# Altium PCB Cook_It.PcbDoc
Units mil, origin at the board's own origin, x right, y up, seen from the top; angles counter-clockwise.
Board outline 3665 x 1590 mil, 2 copper layers (Top Layer, Bottom Layer); 64 components, 73 nets, 302 pads, 25 vias.
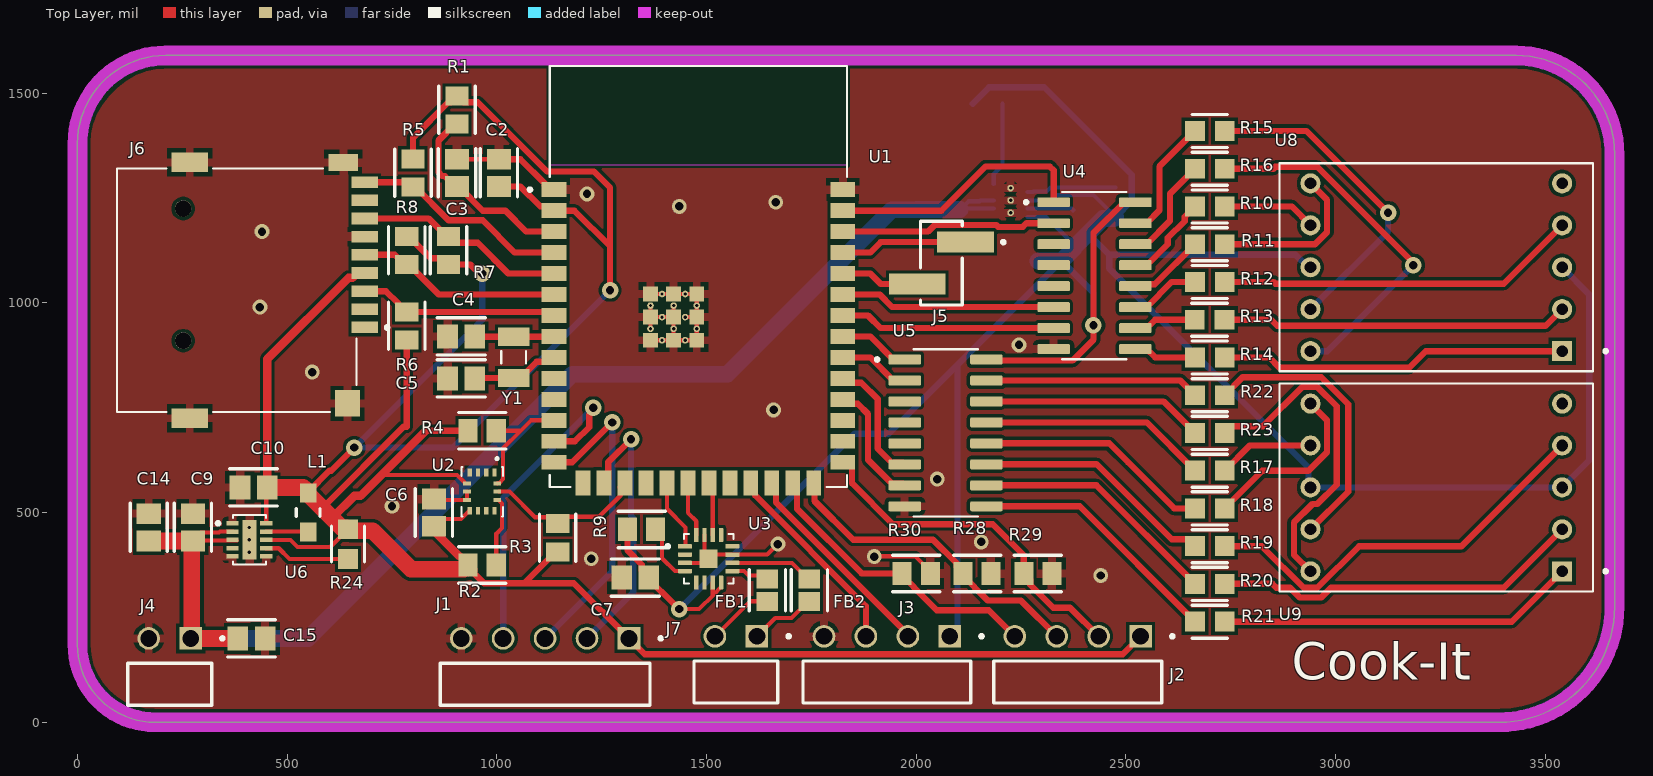
[diagram p0: Top Layer view]
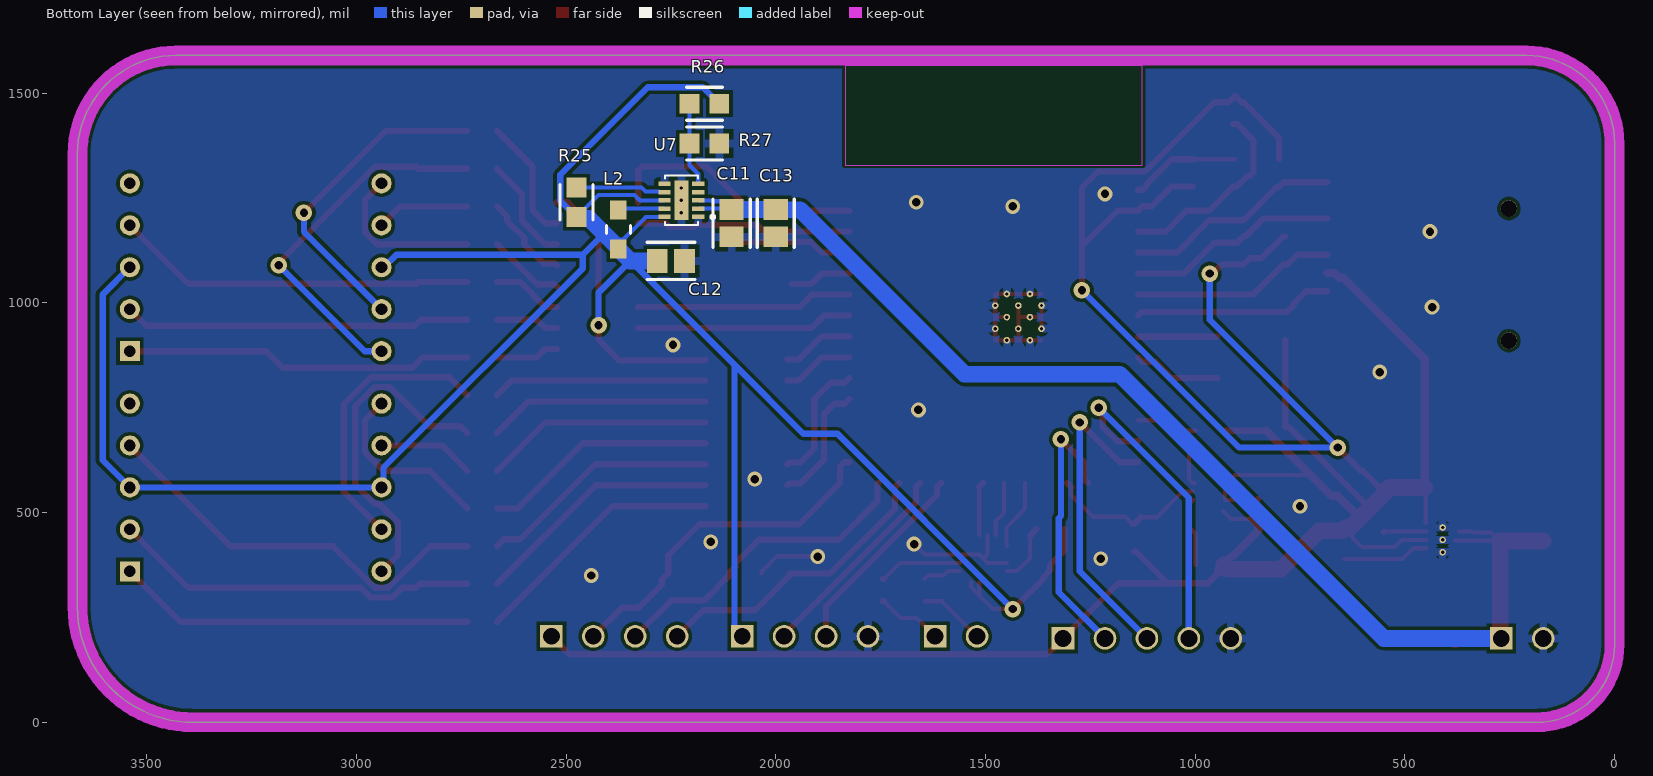
[diagram p1: Bottom Layer view, seen from below]
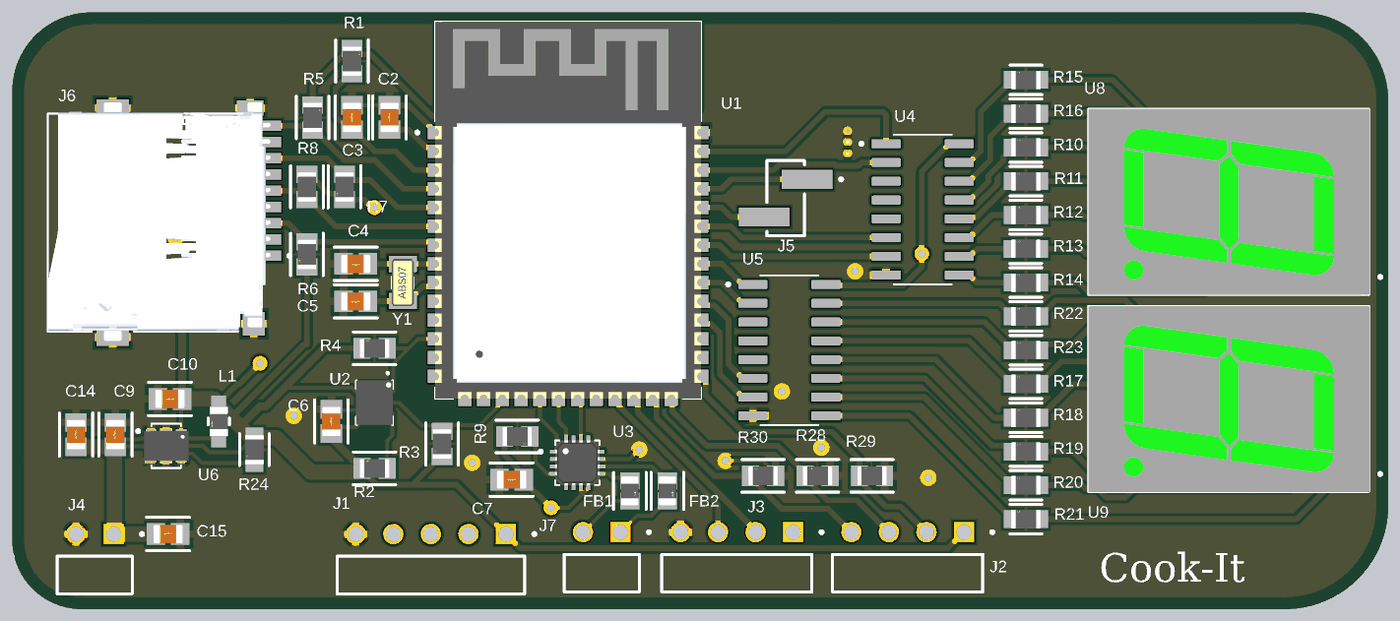
[diagram p2: 3D render of the assembled board from above, using the file's embedded part models]
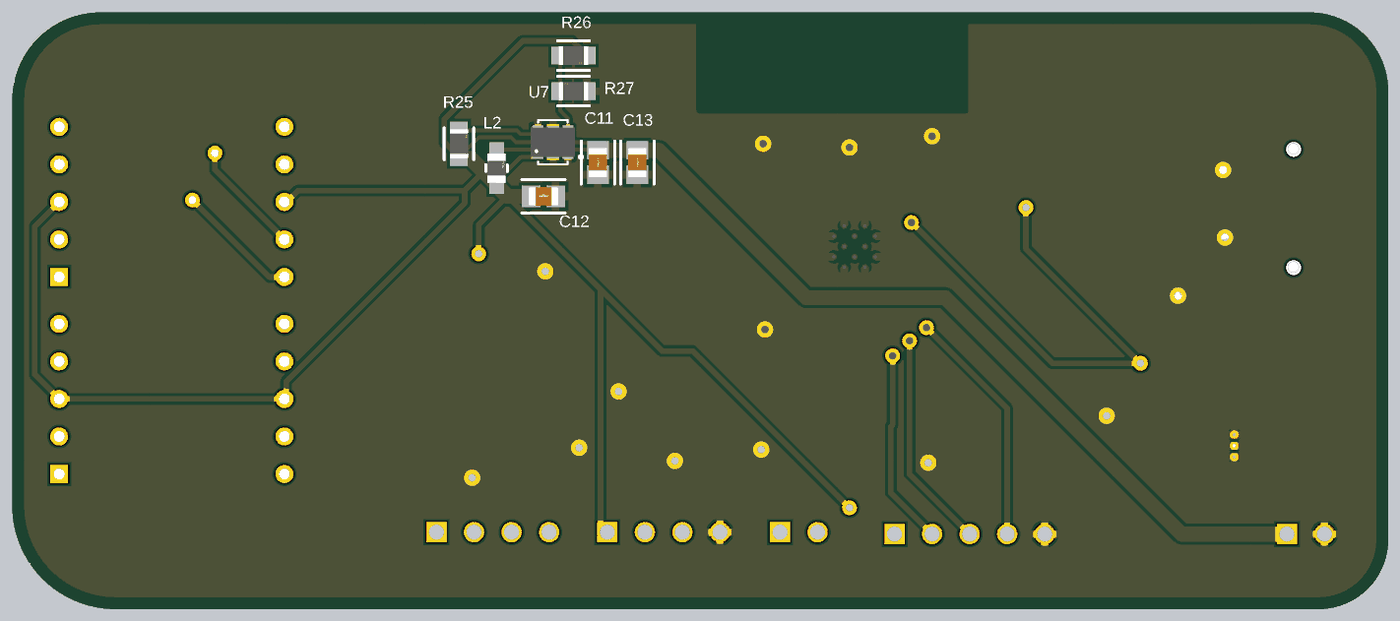
[diagram p3: 3D render of the assembled board from below, using the file's embedded part models]

## Layer stack, top to bottom
Top Solder: solder mask 0.4, Solder Resist, Dk 3.5
Top Layer: signal copper 1.4
Dielectric 1: dielectric 12.6, FR-4, Dk 4.8
Bottom Layer: signal copper 1.4
Bottom Solder: solder mask 0.4, Solder Resist, Dk 3.5

## Board outline
0,1380 0,185 ccw(c185,185) 185,0 3390,0 ccw(c3390,275) 3665,275 3665,1355 ccw(c3430,1355) 3430,1590 210,1590 ccw(c210,1380)

## Design rules (kind name [scope] priority, off if disabled: settings)
BoardOutlineClearance [All] p1: gap=7.87 ignorepadtopadclearanceinfootprint=FALSE except(15.75: Arc-SplitBarrior Arc-SplitContinuation Track-SplitBarrior Track-SplitContinuation SMDPad-SplitBarrior SMDPad-SplitContinuation THPad-SplitBarrior THPad-SplitContinuation Via-SplitBarrior Via-SplitContinuation Fill-SplitBarrior Fill-SplitContinuation Poly-SplitBarrior Poly-SplitContinuation Region-SplitBarrior Region-SplitContinuation Text-SplitBarrior Text-SplitContinuation)
Clearance "Clearance Bottom Layer" [OnLayer('Bottom Layer')] p1: gap=8 ignorepadtopadclearanceinfootprint=TRUE except(10: Arc-Text Track-Text SMDPad-Text THPad-Text Via-Text Fill-Text Poly-Text Region-Text Text-Text)
Clearance "Clearance Top Layer" [OnLayer('Top Layer')] p2: gap=8 ignorepadtopadclearanceinfootprint=TRUE except(10: Arc-Text Track-Text SMDPad-Text THPad-Text Via-Text Fill-Text Poly-Text Region-Text Text-Text)
Clearance [All] p3: gap=7.87 ignorepadtopadclearanceinfootprint=FALSE except(3.5: Arc-Arc Arc-Track Arc-SMDPad Track-Track Track-SMDPad SMDPad-SMDPad; 5: Arc-Via Track-Via SMDPad-Via THPad-Via Via-Via; 10: Arc-Text Track-Text SMDPad-Text THPad-Text Via-Text Fill-Text Poly-Text Region-Text Text-Text)
HoleSize [All] p1: absolutevalues=TRUE maxlimit=248.03 minlimit=7.87 maxpercent=80.000 minpercent=20.000
MinimumAnnularRing [All] p1: minimumring=3
MinimumSolderMaskSliver [All] p1: minsoldermaskwidth=3.94
PolygonConnect PolygonConnect_1 [All] p1: thpad.connectstyle=Relief thpad.reliefconductorwidth=20 thpad.reliefentries=4 thpad.polygonreliefangle="90 Angle" thpad.airgapwidth=10 smdpad.connectstyle=Relief smdpad.reliefconductorwidth=20 smdpad.reliefentries=4 smdpad.polygonreliefangle="90 Angle" smdpad.airgapwidth=10 via.connectstyle=Direct via.reliefconductorwidth=20 via.reliefentries=4 via.polygonreliefangle="90 Angle" via.airgapwidth=10
RoutingCorners [All] p1: cornerstyle=Round minsetback=100 maxsetback=100
RoutingVias [All] p1: holewidth=19.68 width=39.37 viastyle="Through Hole" minholewidth=7.87 minwidth=17.72 maxholewidth=39.37 maxwidth=78.74
SilkToSilkClearance [All] p1: silktosilkclearance=3.94
SilkToSolderMaskClearance [IsPad] p1: minsilkscreentomaskgap=3.94 clearancetoexposedcopper=TRUE
SolderMaskExpansion [All] p1: expansion=4 istentingtop=FALSE
SupplyNets "Schematic Supply Nets" [InNet('GND')] p1: voltage=0.000
Width [All] p1: maxlimit=100 minlimit=3.5 preferedwidth=15
25 further rules are at their usual default settings.

## Classes and differential pairs
component class Power: C9 C10 C11 C12 C13 C14 C15 L1 L2 R24 R25 R26 R27 U6 U7
component class Cook_It: C2 C3 C4 C5 C6 C7 FB1 FB2 R1 R2 R3 R4 R5 R6 R7 R8 R9 R10 R11 R12 R13 R14 R15 R16 R17 R18 R19 R20 R21 R22 R23 R28 R29 R30 U1 U2 U3 U4 U5 Y1
component class Connectors: J1 J2 J3 J4 J5 J6 J7 U8 U9

## Components (designator, comment, footprint, x,y, rotation, side; value= is the part's Value field where it differs from the comment)
C2 "0.1u" FP-GRM21B-0_2-e0_2_0_7-IPC_B 1005,1310 r90 top
C3 "1u" FP-GRM21B-0_2-e0_2_0_7-IPC_B 905,1310 r90 top
C4 "12p" FP-GRM21B-0_2-e0_2_0_7-IPC_B 915,920 r180 top
C5 "12p" FP-GRM21B-0_2-e0_2_0_7-IPC_B 915,820 r180 top
C6 "0.1u" FP-GRM21B-0_2-e0_2_0_7-IPC_B 850,500 r90 top
C7 "0.1u" FP-GRM21B-0_2-e0_2_0_7-IPC_B 1330,345 r180 top
C9 "0.1u" FP-GRM21B-0_2-e0_2_0_7-IPC_B 275,465 r90 top
C10 "22u" FP-GRM21B-0_2-e0_2_0_7-IPC_B 420,560 r180 top
C11 "2.2u" FP-GRM21B-0_2-e0_2_0_7-IPC_B 2105,1190 r270 bottom
C12 "22u" FP-GRM21B-0_2-e0_2_0_7-IPC_B 2250,1100 r180 bottom
C13 "0.1u" FP-GRM21B-0_2-e0_2_0_7-IPC_B 2000,1190 r270 bottom
C14 "2.2u" FP-GRM21B-0_2-e0_2_0_7-IPC_B 170,465 r90 top
C15 "10u" FP-GRM21B-0_2-e0_2_0_7-IPC_B 415,200 r0 top
FB1 "" FP-BMB2A1000LN2-IPC_C 1645,315 r270 top
FB2 "" FP-BMB2A1000LN2-IPC_C 1745,315 r270 top
J1 "TSW-105-22-G-S-RA" SAMTEC_TSW-105-22-G-S-RA 1315,200 r0 top
J2 "TSW-104-22-G-S-RA" SAMTEC_TSW-104-22-G-S-RA 2535,205 r0 top
J3 "TSW-104-22-G-S-RA" SAMTEC_TSW-104-22-G-S-RA 2080,205 r0 top
J4 "TSW-102-22-G-S-RA" SAMTEC_TSW-102-22-G-S-RA 270,200 r0 top
J5 "TSM-102-01-X-SV" SAMTEC_TSM-102-01-X-SV 2060,1095 r90 top
J6 "MSD-4-A" CUI_MSD-4-A 380,1030 r270 top
J7 "TSW-102-22-G-S-RA" SAMTEC_TSW-102-22-G-S-RA 1620,205 r0 top
L1 "10u" FP-LQM21DN_70-MFG 550,500 r90 top
L2 "10u" FP-LQM21DN_70-MFG 2375,1175 r270 bottom
R1 "10k" FP-TFCR0805-IPC_B 905,1460 r270 top
R2 "100k" FP-TFCR0805-IPC_B 965,375 r0 top
R3 "2.2k" FP-TFCR0805-IPC_B 1145,440 r90 top
R4 "2.2k" FP-TFCR0805-IPC_B 965,695 r0 top
R5 "10k" FP-TFCR0805-IPC_B 800,1310 r270 top
R6 "10k" FP-TFCR0805-IPC_B 785,945 r90 top
R7 "10k" FP-TFCR0805-IPC_B 885,1125 r90 top
R8 "10k" FP-TFCR0805-IPC_B 785,1125 r270 top
R9 "1M" FP-TFCR0805-IPC_B 1345,460 r180 top
R10 "200" FP-TFCR0805-MFG 2700,1230 r0 top
R11 "200" FP-TFCR0805-MFG 2700,1140 r0 top
R12 "200" FP-TFCR0805-MFG 2700,1050 r0 top
R13 "200" FP-TFCR0805-MFG 2699.57,960 r0 top
R14 "200" FP-TFCR0805-MFG 2700,870 r0 top
R15 "200" FP-TFCR0805-MFG 2700,1410 r0 top
R16 "200" FP-TFCR0805-MFG 2700,1320 r0 top
R17 "200" FP-TFCR0805-MFG 2700,600 r0 top
R18 "200" FP-TFCR0805-MFG 2700,510 r0 top
R19 "200" FP-TFCR0805-MFG 2700,420 r0 top
R20 "200" FP-TFCR0805-MFG 2700,330 r0 top
R21 "200" FP-TFCR0805-MFG 2700,240 r0 top
R22 "200" FP-TFCR0805-MFG 2700,780 r0 top
R23 "200" FP-TFCR0805-MFG 2700,690 r0 top
R24 "100k" FP-TFCR0805-MFG 645,425 r90 top
R25 "100k" FP-TFCR0805-MFG 2475,1240 r270 bottom
R26 "52.3k" FP-TFCR0805-MFG 2170,1475 r0 bottom
R27 "10k" FP-TFCR0805-MFG 2170,1380 r180 bottom
R28 "51k" FP-TFCR0805-IPC_B 2145,355 r0 top
R29 "51k" FP-TFCR0805-IPC_B 2290,355 r0 top
R30 "51k" FP-TFCR0805-IPC_B 2000,355 r0 top
U1 "ESP32-S3-WROOM-1-N8R8" XCVR_ESP32S3WROOM1N8R8 1480.51,1062.91 r0 top
U2 "BMI270" XDCR_BMI270 965,550 r270 top
U3 "MAX98357AETE+T" QFN50P300X300X80-17N 1505,390 r0 top
U4 "SN74LS47N" SOIC127P600X175-16N 2425,1065 r0 top
U5 "SN74LS47N" SOIC127P600X175-16N 2070,690 r0 top
U6 "TPS62175DQCR" SON50P300X200X80-11N240X84 410,435 r0 top
U7 "TPS62175DQCR" SON50P300X200X80-11N240X84 2225,1244.4 r0 bottom
U8 "LDSC512RI" LED_LDSC512RI 3240,1085 r180 top
U9 "LDSC512RI" LED_LDSC512RI 3240,560 r180 top
Y1 "32.768k" XTAL_ABS07-32.768KHZ-T 1040,870 r90 top

## Footprints (in the part's own frame and the unit in brackets; to place one, negate y for a bottom-side part, rotate by r counter-clockwise, add the part's x,y. Pads: shape width x height; smd on the part's side, far side on the other; paste and mask are expansions set on the pad)
CUI_MSD-4-A [mm]
  rect 0.7x1.6 smd: 1(2.25,7.75) 2(1.15,7.75) 3(0.05,7.75) 4(-1.05,7.75) 5(-2.15,7.75) 6(-3.25,7.75) 7(-4.35,7.75) 8(-5.45,7.75) CD(-6.55,7.75)
  rect 1.022x1.8 smd: G1(-7.75,6.45)
  rect 1.6x1.5 smd: G2(6.85,6.7)
  rect 1.2x2.2 smd: G3(-7.75,-2.85) G4(7.75,-2.85)
  round 1 hole 1 unplated: ""(-4.95,-3.25) ""(3.05,-3.25)
  silkscreen extent -7.37,-7.25 7.37,9.2, body extent -8.15,-7.24 8,7.81, height 1.8
FP-BMB2A1000LN2-IPC_C [mil]
  rect 45.45x51.43 smd paste+0 mask+0: 1(-26.61,0) 2(26.61,0)
  silkscreen extent -49,-43 49,43, body extent -53,-31 53,31, height 10
FP-GRM21B-0_2-e0_2_0_7-IPC_B [mil]
  rect 49.4x57.33 smd paste+0 mask+0: 1(-32.51,0) 2(32.51,0)
  silkscreen extent -57,-44 57,44, body extent -67,-39 67,39, height 10
FP-LQM21DN_70-MFG [mm]
  rect 1.15x1 smd paste+0 mask+0: 1(-1.175,0) 2(1.175,0)
  silkscreen extent -0.23,-0.72 0.23,0.72, body extent -1,-0.63 1,0.63, height 1.45
FP-TFCR0805-IPC_B [mil]
  rect 45.5x55.44 smd paste+0 mask+0: 1(-33.51,0) 2(33.51,0)
  silkscreen extent -56,-43 56,43, body extent -66,-38 66,38, height 10
FP-TFCR0805-MFG [mm]
  rect 1.2x1.2 smd paste+0 mask+0: 1(-0.9,0) 2(0.9,0)
  silkscreen extent -1.07,-1 1.07,1, body extent -1.6,-0.8 1.6,0.8, height 0.25
LED_LDSC512RI [mm]
  rect 1.218x1.218 / inner round 1.218 / far side rect 1.218x1.218 hole 0.71: 1(-7.62,5.08)
  round 1.218 hole 0.71: 2(-7.62,2.54) 3(-7.62,0) 4(-7.62,-2.54) 5(-7.62,-5.08) 6(7.62,-5.08) 7(7.62,-2.54) 8(7.62,0) 9(7.62,2.54) 10(7.62,5.08)
  silkscreen extent -10.35,-6.3 9.5,6.3, body extent -9.53,-6.3 9.47,6.3, height 8
QFN50P300X300X80-17N [mm]
  rrect25% 0.84x0.27 smd mask+0.051: 1(-1.435,0.75) 4(-1.435,-0.75) 9(1.435,-0.75) 12(1.435,0.75)
  rrect25% 0.84x0.27 smd mask+0.064: 2(-1.435,0.25) 3(-1.435,-0.25) 10(1.435,-0.25) 11(1.435,0.25)
  rrect25% 0.27x0.84 smd mask+0.051: 5(-0.75,-1.435) 8(0.75,-1.435) 13(0.75,1.435) 16(-0.75,1.435)
  rrect25% 0.27x0.84 smd mask+0.064: 6(-0.25,-1.435) 7(0.25,-1.435) 14(0.25,1.435) 15(-0.25,1.435)
  rect 1.1x1.1 smd paste-0.2: 17(0,0)
  silkscreen extent -2.57,-1.5 1.5,1.5, body extent -1.5,-1.5 1.5,1.5, height 0.9
SAMTEC_TSM-102-01-X-SV [mm]
  rect 1.27x3.43 smd: 01(1.27,-1.46) 02(-1.27,1.46)
  silkscreen extent -2.54,-3.85 2.54,1.27
SAMTEC_TSW-102-22-G-S-RA [mm]
  rect 1.37x1.37 hole 1.02: 01(0,0)
  round 1.37 hole 1.02: 02(-2.54,0)
  silkscreen extent -3.81,-4.04 2.02,0.1
SAMTEC_TSW-104-22-G-S-RA [mm]
  rect 1.37x1.37 / inner round 1.37 / far side rect 1.37x1.37 hole 1.02: 01(0,0)
  round 1.37 hole 1.02: 02(-2.54,0) 03(-5.08,0) 04(-7.62,0)
  silkscreen extent -8.89,-4.04 2.02,0.1
SAMTEC_TSW-105-22-G-S-RA [mm]
  rect 1.37x1.37 hole 1.02: 01(0,0)
  round 1.37 hole 1.02: 02(-2.54,0) 03(-5.08,0) 04(-7.62,0) 05(-10.16,0)
  silkscreen extent -11.43,-4.04 2.02,0.1
SOIC127P600X175-16N [mm]
  rrect25% 1.97x0.6 smd: 1(-2.475,4.445) 2(-2.475,3.175) 3(-2.475,1.905) 4(-2.475,0.635) 5(-2.475,-0.635) 6(-2.475,-1.905) 7(-2.475,-3.175) 8(-2.475,-4.445) 9(2.475,-4.445) 10(2.475,-3.175) 11(2.475,-1.905) 12(2.475,-0.635) 13(2.475,0.635) 14(2.475,1.905) 15(2.475,3.175) 16(2.475,4.445)
  silkscreen extent -4.24,-5.06 1.95,5.06
SON50P300X200X80-11N240X84 [mm]
  rrect7% 0.74x0.27 smd mask+0.064: 1(-1.02,1) 2(-1.02,0.5) 3(-1.02,0) 4(-1.02,-0.5) 5(-1.02,-1) 6(1.02,-1) 7(1.02,-0.5) 8(1.02,0) 9(1.02,0.5) 10(1.02,1)
  rect 0.84x2.4 smd paste-2 mask+0.038: 11(0,0)
  round 0.4 hole 0.2: 11_1(0,0.747) 11_2(0,0) 11_3(0,-0.747)
  silkscreen extent -2,-1.5 1,1.5, body extent -1.5,-1 1.5,1, height 0.8
XCVR_ESP32S3WROOM1N8R8 [mm]
  rect 1.5x0.9 smd: 1(-8.75,5.26) 2(-8.75,3.99) 3(-8.75,2.72) 4(-8.75,1.45) 5(-8.75,0.18) 6(-8.75,-1.09) 7(-8.75,-2.36) 8(-8.75,-3.63) 9(-8.75,-4.9) 10(-8.75,-6.17) 11(-8.75,-7.44) 12(-8.75,-8.71) 13(-8.75,-9.98) 14(-8.75,-11.25) 27(8.75,-11.25) 28(8.75,-9.98) 29(8.75,-8.71) 30(8.75,-7.44) 31(8.75,-6.17) 32(8.75,-4.9) 33(8.75,-3.63) 34(8.75,-2.36) 35(8.75,-1.09) 36(8.75,0.18) 37(8.75,1.45) 38(8.75,2.72) 39(8.75,3.99) 40(8.75,5.26)
  rect 0.9x1.5 smd: 15(-6.985,-12.5) 16(-5.715,-12.5) 17(-4.445,-12.5) 18(-3.175,-12.5) 19(-1.905,-12.5) 20(-0.635,-12.5) 21(0.635,-12.5) 22(1.905,-12.5) 23(3.175,-12.5) 24(4.445,-12.5) 25(5.715,-12.5) 26(6.985,-12.5)
  rect 0.9x0.9 smd: 41_1(-1.5,-2.46) 41_2(-2.9,-2.46) 41_3(-0.1,-2.46) 41_4(-2.9,-3.86) 41_5(-1.5,-3.86) 41_6(-0.1,-3.86) 41_7(-2.9,-1.06) 41_8(-1.5,-1.06) 41_9(-0.1,-1.06)
  round 0.4 hole 0.2 mask+0: 41_10(-1.5,-1.76) 41_11(-2.9,-1.76) 41_12(-0.1,-1.76) 41_13(-2.9,-3.16) 41_14(-1.5,-3.16) 41_15(-0.1,-3.16) 41_16(-2.2,-1.06) 41_17(-0.8,-1.06) 41_18(-2.2,-2.46) 41_19(-0.8,-2.46) 41_20(-2.2,-3.86) 41_21(-0.8,-3.86)
  Keep-Out Layer region: 9,6.75 -9,6.75 -9,12.75 9,12.75
  Keep-Out Layer region: 9,6.75 -9,6.75 -9,12.75 9,12.75
  silkscreen extent -10.3,-12.75 9,12.75, body extent -9,-12.75 9,12.75, height 3.25
XDCR_BMI270 [mm]
  rect 0.475x0.25 smd mask+0.064: 1(-1.162,0.75) 2(-1.162,0.25) 3(-1.162,-0.25) 4(-1.162,-0.75) 8(1.162,-0.75) 9(1.162,-0.25) 10(1.162,0.25) 11(1.162,0.75)
  rect 0.25x0.475 smd mask+0.064: 5(-0.5,-0.913) 6(0,-0.913) 7(0.5,-0.913) 12(0.5,0.913) 13(0,0.913) 14(-0.5,0.913)
  silkscreen extent -2.07,-1.25 1.5,1.25, body extent -1.5,-1.25 1.5,1.25, height 0.87
XTAL_ABS07-32.768KHZ-T [mm]
  rect 1.1x1.9 smd: 1(-1.25,0) 2(1.25,0)
  silkscreen extent -0.38,-0.75 0.38,0.75, body extent -1.6,-0.75 1.6,0.75, height 0.89

## Part data
C2 C3 C4 C5 C6 C7 C9 C10 C11 C12 C13 C14 C15: library part CMP-06035-063309-1, "CAP CER 2.2UF 100V X7T 0805"
FB1 FB2: library part CMP-03232-000001-1, "FERRITE BEAD 1 KOHM 0805 1LN", Case Code (Imperial)=0805, Case Code (Metric)=2012, DC Resistance (DCR)=300mR, Max Current Rating=350mA, Max Operating Temperature=125°C, Min Operating Temperature=-55°C, Resistor Type="Ferrite Bead", Tolerance=25%, Case/Package=0805, Core Material=Ferrite, Depth=1.4mm, ELV=Compliant, Height=1.1mm, Impedance=1kR, Lead/Base Style=SMD/SMT, Max DC Current=350mA, Mount="Surface Mount", Number of Lines=1, Number of Pins=2, Packaging="Tape and Reel", RoHS Compliant=Yes, Series=BMB-L
J1: "Conn Unshrouded Header HDR 5 POS 2.54mm Solder RA Side Entry Thru-Hole Bulk", Package=None, Availability="In Stock", Check_prices=https://www.snapeda.com/parts/TSW-105-22-G-S-RA/Samtec/view-part/?ref=eda, MF=Samtec, MP=TSW-105-22-G-S-RA, Price=None, Purchase-URL=https://pricing.snapeda.com/search/part/TSW-105-22-G-S-RA/?ref=eda, SnapEDA_Link=https://www.snapeda.com/parts/TSW-105-22-G-S-RA/Samtec/view-part/?ref=snap
J2 J3 J4 J7: Package=None, Availability=Unavailable, MF=Samtec, Price=None
  J2 J3: MP=TSW-104-22-G-S-RA
  J4 J7: MP=TSW-102-22-G-S-RA
J5: "TSM - Samtec 2.54mm Single Row Vertical Surface Mount Header 5.84mm Post Height (01) - Fast Stock", Package=None, Check_prices=https://www.snapeda.com/parts/TSM-102-01-L-SV/Samtec+Inc./view-part/?ref=eda, MF=Samtec, MP=TSM-102-01-L-SV, SnapEDA_Link=https://www.snapeda.com/parts/TSM-102-01-L-SV/Samtec+Inc./view-part/?ref=snap
J6: "Micro SD Card Connector, 9 Positions, Connector and Ejector, Push In, Auto Eject Out, Surface Mount, 1.8 mm Height Above Board, Gold Flash", Package=None, Check_prices=https://www.snapeda.com/parts/MSD-4-A/Same+Sky/view-part/?ref=eda, MF="Same Sky", MP=MSD-4-A, SnapEDA_Link=https://www.snapeda.com/parts/MSD-4-A/Same+Sky/view-part/?ref=snap
L1 L2: library part CMP-00260-111578617-1, "LQM21DN330M70L Multilayer Inductor, 33 µH, 2.99 ohm, 16 MHz, 200 mA, 0805 [2012 Metric], LQM", Case/Package=0805, Current Rating=200mA, Inductance=33µH, Manufacturer Lifecycle Status="IN PRODUCTION NEW", Max Operating Temperature=125°C, Min Operating Temperature=-55°C, Resistance=2.99Ω, Saturation Current=80mA, Self Resonant Frequency=16MHz, Test Frequency=1MHz, Tolerance=20%, Core Material=Ferrite, Height=1.45mm, NexarPartId=111578617, RMS Current (Irms)=200mA, Schedule B="8504500000, 8504500000", Series Resistance=2.99Ω
R1 R2 R3 R4 R5 R6 R7 R8 R9 R28 R29 R30: library part CMP-250906-214896-1, "RES Thin Film,  499kΩ, 0.1%, 0.125W, 25ppm/°C, 0805"
R10 R11 R12 R13 R14 R15 R16 R17 R18 R19 R20 R21 R22 R23 R24 R25 R26 R27: library part CMP-250906-142014-1, "RES Thin Film,  1.72kΩ, 1%, 0.125W, 25ppm/°C, 0805"
U1: "Bluetooth, WiFi 802.11b/g/n, Bluetooth v5.0 Transceiver Module 2.4GHz PCB Trace Surface Mount", Package=None, Availability="In Stock", Check_prices=https://www.snapeda.com/parts/ESP32-S3-WROOM-1-N8R8/Espressif+Systems/view-part/?ref=eda, MF="Espressif Systems", MP=ESP32-S3-WROOM-1-N8R8, Price=None, Purchase-URL=https://pricing.snapeda.com/search?q=ESP32-S3-WROOM-1-N8R8&ref=eda, SnapEDA_Link=https://www.snapeda.com/parts/ESP32-S3-WROOM-1-N8R8/Espressif+Systems/view-part/?ref=snap
U2: "Accelerometer, Gyroscope, 6 Axis Sensor IÂ²C, SPI Output", Package="LGA-14 Bosch Sensortec", Check_prices=https://www.snapeda.com/parts/BMI270/Bosch+Sensortec/view-part/?ref=eda, Digi-Key_Part_Number=828-1091-2-ND, MF="Bosch Sensortec", MP=BMI270, Purchase-URL=https://pricing.snapeda.com/search/part/BMI270/?ref=eda, SnapEDA_Link=https://www.snapeda.com/parts/BMI270/Bosch+Sensortec/view-part/?ref=snap
U3: "Tiny, Low-Cost, PCM Class D Amplifier with Class AB Performance", Package="TQFN-16 Maxim", Check_prices=https://www.snapeda.com/parts/MAX98357AETE+T/Analog+Devices/view-part/?ref=eda, MF="Analog Devices", MP=MAX98357AETE+T, SnapEDA_Link=https://www.snapeda.com/parts/MAX98357AETE+T/Analog+Devices/view-part/?ref=snap
U4 U5: "Decoder/Driver Single 4-to-7 16-Pin PDIP Tube", Package=None, Check_prices=https://www.snapeda.com/parts/SN74LS47N/Onsemi/view-part/?ref=eda, MF=onsemi, MP=SN74LS47N, SnapEDA_Link=https://www.snapeda.com/parts/SN74LS47N/Onsemi/view-part/?ref=snap
U6 U7: "28V, 0.5A Step-Down Converter with SNOOZE Mode 10-WSON -40 to 85", Package="WSON-10 Texas Instruments", Availability=Good, Check_prices=https://www.snapeda.com/parts/TPS62175DQCR/Texas%20Instruments/view-part/494000/?ref=eda, MF="Texas Instruments", MP=TPS62175DQCR, Price=None, Purchase-URL=https://pricing.snapeda.com/search/part/TPS62175DQCR/?ref=eda, SnapEDA_Link=https://www.snapeda.com/parts/TPS62175DQCR/Texas%20Instruments/view-part/494000/?ref=snap
U8 U9: ".56IN. 7 SEGMENT SINGLE DISPLAY, 565NM GREEN, GRAY FACE, WHITE SEGMENTS, COMMON", Package=None, Check_prices=https://www.snapeda.com/parts/LDS-C512RI/Lumex/view-part/?ref=eda, MF=Lumex, MP=LDS-C512RI, SnapEDA_Link=https://www.snapeda.com/parts/LDS-C512RI/Lumex/view-part/?ref=snap
Y1: library part ABS07-32.768KHZ-T, "32.768 kHz Â±20ppm Crystal 12.5pF 70 kOhms 2-SMD, No Lead", Package="SMD-2 Abracon LLC", Availability="In Stock", Check_prices=https://www.snapeda.com/parts/ABS07-32.768KHZ-T/Abracon+LLC/view-part/?ref=eda, MF=Abracon, MP=ABS07-32.768KHZ-T, Price=None, Purchase-URL=https://pricing.snapeda.com/search/part/ABS07-32.768KHZ-T/?ref=eda, SnapEDA_Link=https://www.snapeda.com/parts/ABS07-32.768KHZ-T/Abracon+LLC/view-part/?ref=snap

## Via types
v1: diameter 35.43/35.43 (per signal layer), hole 20.12, Top Layer to Bottom Layer, 15 vias
v2: diameter 39.37, hole 19.68, Top Layer to Bottom Layer, 10 vias

## Nets (pads, with @x,y where several pads share a name; then routed paths per layer and width w, separated by ;. In a path a pad name is that pad's centre, name@x,y a point inside that pad or via, vN(x,y) a via of type N, cw(c..) or ccw(c..) an arc to the next point about the centre after c; other vN are vias at no path point)
3V3: C2.1 C6.1 C10.1 J1.01 J2.01 J6.4 L1.2 R1.1 R2.1 R3.1 R4.1 R5.1 R6.1 R7.1 R8.1 R24.2 U1.2 U2.5 U2.8 U6.8 U6.10 | length 7537.2
  Top Layer w10: U6.8@449.17,435 508.03,435 524.93,418.1 602.67,418.1 R24.2 ; U6.10@450,475 450,557.49 C10.1 ; 725,590 905,590 U2.5@922.57,572.43 ; C6.1@867.2,484.69 914.69,484.69 U2.8@934.85,504.85
  Top Layer w15: L1.2 550,548.58 550,549.21 600.79,600 605,600 v2(660,655) ; 583.22,510.72 777.5,705 785,705 R6.1 ; R8.1 789.97,1158.51 818.75,1129.74 819.14,1129.74 842.14,1106.74 869.75,1106.74 R7.1 936.92,1091.49 958.41,1070 v2(965,1070) ; R5.1 800,1393.88 884.38,1478.26 889.75,1478.26 R1.1 920.25,1478.26 954.66,1478.26 1119.76,1313.16 1231.84,1313.16 1270,1275 1270,1135 ; 830,695 R4.1 ; C6.1 C6.1@867.2,484.69 ; R2.1@911.27,395.22 916.24,395.22 R2.1@933.97,377.49 ; R2.1@946.74,364.72 946.74,354.38 969.34,331.78 1065.32,331.78 ; C2.1 1056.17,1277.49 1103.44,1230.22 1125.81,1230.22 U1.2 1185,1220 1270,1135 ; R3.1 1140.03,406.49 1065.32,331.78 ; v2(1270,1030) 1270,1135 ; J2.01 2492.53,162.53 1352.47,162.53 J1.01 1183.22,331.78 1065.32,331.78
  Top Layer w20: C10.1 452.51,866.16 646.17,1059.81 655.87,1059.81 667.4,1071.34 J6.4 ; 606.97,486.97 660,540 675,540 725,590 830,695 ; C6.1 850,456.49 R2.1@911.27,395.22
  Top Layer w40: C10.1 538.58,560 L1.2@550,548.58 ; L1.2 550,543.94 583.22,510.72 606.97,486.97 629.88,464.06 641.38,464.06 R24.2 648.62,456.81 703.19,456.81 795,365 921.49,365 923.77,367.28 928.74,367.28 931.49,370.03 R2.1
  Bottom Layer w15: v2(965,1070) 965,960 v2(660,655) 895,655 v2(1270,1030)
5V: C7.1 C12.1 J3.01 L2.2 R9.2 R25.2 R26.1 U3.7 U3.8 U4.16 U5.16 U7.8 U7.10 U8.3 U8.8 U9.3 U9.8 | length 6876.6
  Top Layer w10: v2(1435,270) 1482.24,270 1516.12,303.88 ; U3.7 1514.84,305.16 1516.12,303.88 ; U3.8 1534.53,322.28 1516.12,303.88
  Top Layer w15: R9.2 1311.49,409.78 1345.31,375.95 1345.31,362.2 C7.1 1362.51,341.03 1393.25,310.29 1394.71,310.29 v2(1435,270) v2@1437.13,267.87 ; U5.16 2169.75,862.69 2372.69,862.69 2422.55,912.55 v2(2422.55,946.66) 2422.55,1167.08 2495.47,1240 U4.16
  Bottom Layer w10: U7.10 2309.77,1205.03 2364.27,1150.53 L2.2@2394.47,1150.53 ; U7.8 2324.4,1244.4 2336.9,1256.9 2422.67,1256.9 R25.2
  Bottom Layer w15: v2(1435,270) 1852.81,687.81 1934.07,687.81 2098.13,851.87 ; J3.01 2098.13,223.13 2098.13,851.87 ; R26.1 2173.69,1514.12 2305.48,1514.12 2514.12,1305.48 2514.12,1243.69 R25.2 ; 2410,1165 2460,1115 ; v2(2422.55,946.66) 2422.55,1023.71 2346.26,1100 2098.13,851.87 ; U8.8 2934.27,1085 2904.27,1115 2460,1115 ; U8.3 3605,1020 3605,625 U9.3 U9.8 2935.48,564.52 2935.48,606.48 2460,1081.96 2460,1115
  Bottom Layer w40: C12.1@2290,1100 2346.26,1100 L2.2 2375,1131.06 2394.47,1150.53 2444.88,1200.94 2471.38,1200.94 R25.2
9V: C9.1 C11.1 C13.1 C14.1 C15.1 J4.01 U6.2 U6.3 U7.2 U7.3 | length 3092.6
  Top Layer w10: C9.1 C9.1@276.14,433.63 ; U6.2@370.83,454.68 339.68,454.68 337.19,452.19 294.7,452.19 C9.1@276.14,433.63 ; U6.3@380.46,433.63 C9.1@276.14,433.63
  Top Layer w15: C15.1@380,197.51 C15.1
  Top Layer w20: C9.1@272.5,429.99 C9.1 ; C15.1 C15.1@382.49,203.97
  Top Layer w40: C14.1 C9.1 ; C9.1@272.5,429.99 272.5,202.5 J4.01 377.79,200 380,197.79 C15.1@380,197.51
  Bottom Layer w10: C11.1 C11.1@2107.21,1224.72 ; U7.2 C11.1@2107.21,1224.72 ; U7.3 2153.06,1244.4 2150.87,1242.21 2124.7,1242.21 C11.1@2107.21,1224.72
  Bottom Layer w40: J4.01 550,200 1180,830 1550,830 1942.15,1222.15 1999.64,1222.15 C13.1 C11.1
A1: U1.34 U4.7 | length 515
  Top Layer w15: U1.34 1885,970 1915,940 U4.7
A2: U1.30 U5.7 | length 296.6
  Top Layer w15: U1.30 1835.22,759.78 1860.22,759.78 1885,735 1885,625.59 1941.28,569.31 1968.25,569.31 U5.7
B1: U1.39 U4.1 | length 625.9
  Top Layer w15: U1.39 2060,1220 2165,1325 2318.77,1325 2327.56,1316.21 U4.1
B2: U1.33 U5.1 | length 170.3
  Top Layer w15: U1.33 1890.59,920 1945.59,865 U5.1
BCLK_MAX: U1.20 U3.16 | length 132.6
  Top Layer w10: U1.20 1455.51,499.49 1475.47,479.53 U3.16
C1: U1.38 U4.2 | length 514.4
  Top Layer w15: U1.38 2028.04,1170 2043.54,1185.5 2191.42,1185.5 2195.73,1181.19 2253.87,1181.19 2262.67,1190 U4.2
C2: U1.32 U5.2 | length 170.3
  Top Layer w15: U1.32 1890.59,870 1945.59,815 U5.2
CLK_SD: J6.5 R8.2 U1.6 | length 490.1
  Top Layer w15: J6.5 756.87,1114.65 780.03,1091.49 R8.2 789.97,1091.49 861.46,1020 U1.6
CLK_Strip: J3.02 U1.24 | length 500.2
  Top Layer w15: U1.24 1665.73,560.57 1665.73,523.93 1980,209.66 J3.02
CS_SD: J6.CD R5.2 U1.4 | length 520.4
  Top Layer w15: J6.CD 788.61,1287.87 R5.2 804.97,1276.49 884.69,1196.76 966.07,1196.76 1042.83,1120 U1.4
D1: U1.35 U4.6 | length 515
  Top Layer w15: U1.35 1913.08,1020 1943.08,990 U4.6
D2: U1.31 U5.6 | length 301.7
  Top Layer w15: U1.31 1835.22,809.78 1868.96,809.78 1908,770.74 1908,652.59 1941.28,619.31 1968.25,619.31 U5.6
Data_Strip: J3.03 U1.23 | length 479.5
  Top Layer w15: U1.23 1615.73,560.57 1615.73,541.24 1880,276.97 J3.03
DIN_MAX: U1.19 U3.1 | length 169.2
  Top Layer w10: U1.19 1405.51,509.12 1450,464.64 1450,422.15 U3.1@1448.5,420.66
GND: C2.2 C3.2 C4.2 C5.2 C6.2 C7.2 C9.2 C10.2 C11.2 C12.2 C13.2 C14.2 C15.2 J1.05 J3.04 J4.02 J6.6 J6.G1 J6.G2 J6.G3 J6.G4 R27.2 R28.2 R29.2 R30.2 U1.1 U1.40 U1.41_1 U1.41_2 U1.41_3 U1.41_4 U1.41_5 U1.41_6 U1.41_7 U1.41_8 U1.41_9 U1.41_10 U1.41_11 U1.41_12 U1.41_13 U1.41_14 U1.41_15 U1.41_16 U1.41_17 U1.41_18 U1.41_19 U1.41_20 U1.41_21 U2.6 U2.7 U3.3 U3.11 U3.15 U3.17 U4.8 U5.8 U6.1 U6.5 U6.6 U6.11 U6.11_1 U6.11_2 U6.11_3 U7.1 U7.6 U7.11 U7.11_1 U7.11_2 U7.11_3 | length 1368.8
  Top Layer w10: C6.2@852.2,530.32 U2.7 U2.6 ; C3.2 C2.2 ; U1.41_4 U1.41_20 U1.41_5 ; U1.41_13 U1.41_2 ; U1.41_11 U1.41_2 ; U1.41_7 U1.41_16 U1.41_8 U1.41_17 U1.41_9 U1.41_12 U1.41_3 ; U1.41_10 U1.41_1 ; U3.3 1495.16,380.16 U3.17 ; U1.41_19 U1.41_3 ; U3.15 1495.16,399.84 U3.17 ; v1(1670,425) 1644.84,399.84 U3.11 1514.84,399.84 U3.17 ; v1(1900,395) 1900.72,395.72 1997.76,395.72 2033.51,359.97 R30.2 ; U1.41_2 U1.41_18 U1.41_1 ; U1.41_5 U1.41_14 U1.41_1 ; U1.41_5 U1.41_21 U1.41_6 U1.41_15 U1.41_3
  Top Layer w15: C6.2 C6.2@852.2,530.32 ; C2.2 1056.17,1342.51 1114,1284.68 1114,1280.22 1124.21,1270 U1.1
  other v1: 2440,350 1225,390 2155,430 750,515 2050,580 1660,745 560,835 2245,900 435,990 440,1170 1435,1230 1665,1240 1215,1260
Hall_1: J1.02 U1.16 | length 653.6
  Top Layer w15: U1.16 1265.73,581 1265.73,620.73 v2(1320,675)
  Bottom Layer w15: J1.02 1325,310 1325,486.7 1320,491.7 v2(1320,675)
Hall_2: J1.03 U1.14 | length 759.6
  Top Layer w15: U1.14 1180,620 v2(1275,715)
  Bottom Layer w15: J1.03 1275,360 v2(1275,715)
Hall_3: J1.04 U1.13 | length 787.4
  Top Layer w15: U1.13 1186.21,670 1220,703.79 1220,733.41 1230,743.41 v2(1230,750)
  Bottom Layer w15: J1.04 1015,535 v2(1230,750)
LRCLK_MAX: U1.21 U3.14 | length 128.2
  Top Layer w10: U3.14 U1.21@1514.84,561.46
  Top Layer w15: U1.21 U1.21@1514.84,561.46
MISO_SD: J6.7 R7.2 U1.5 | length 505.3
  Top Layer w15: J6.7 837.28,1201.26 880.03,1158.51 R7.2 900.25,1143.26 954.21,1143.26 1027.47,1070 U1.5
MOSI_SD: J6.3 R6.2 U1.7 | length 477.9
  Top Layer w15: J6.3 735.48,1028.03 764.78,998.73 764.78,993.76 780.03,978.51 R6.2 1127.51,978.51 U1.7
N_OUT: FB2.2 J7.01 | length 159.5
  Top Layer w10: J7.01 1663.82,248.82 1702.44,248.82 FB2.2@1742.01,288.39
  Top Layer w15: FB2.2@1742.01,288.39 FB2.2
NetC3_1: C3.1 R1.2 U1.3 | length 475
  Top Layer w15: R1.2@909.97,1426.49 R1.2 900.03,1426.49 860.83,1387.29 860.83,1311.39 869.91,1302.31 876.21,1302.31 901.03,1277.49 C3.1 908.97,1277.49 966.69,1219.76 1020.57,1219.76 1070.33,1170 U1.3
NetC4_1: C4.1 U1.8 Y1.2 | length 189.2
  Top Layer w15: C4.1 948.3,919.21 Y1.2 1040.39,919.61 1135.63,919.61 U1.8
NetC5_1: C5.1 U1.9 Y1.1 | length 209.2
  Top Layer w15: C5.1 948.3,820.79 Y1.1 1055.75,820.79 1094.74,859.78 1125.81,859.78 U1.9
NetFB1_1: FB1.1 U3.9 | length 91.3
  Top Layer w10: U3.9 1589.53,360.47 1600,350 1636.61,350 FB1.1
NetFB2_1: FB2.1 U3.10 | length 199.5
  Top Layer w10: U3.10 1703.46,380.16 FB2.1@1742.01,341.61
  Top Layer w15: FB2.1@1742.01,341.61 FB2.1
NetL1_1: L1.1 U6.9 | length 101.2
  Top Layer w10: U6.9@449.17,454.68 L1.1@549.06,454.68
  Top Layer w15: L1.1@549.06,454.68 L1.1
NetL2_1: L2.1 U7.9 | length 112.6
  Bottom Layer w10: U7.9 2371.54,1224.72 L2.1 L2.1@2374.06,1220.32
NetR2_2: R2.2 U2.12 | length 164
  Top Layer w10: R2.2 998.51,449.39 1012.45,463.33 1012.45,522.01 1005.28,529.18 U2.12@1005.28,530.24
NetR9_1: R9.1 U3.4 | length 142.6
  Top Layer w10: R9.1@1393.76,444.75 1393.76,391.24 1424.53,360.47 U3.4
  Top Layer w15: R9.1 R9.1@1393.76,444.75
NetR10_1: R10.1 U4.13 | length 215
  Top Layer w15: U4.13 2526.75,1094.31 2554.31,1094.31 2600,1140 2600,1155 2640,1195 2640,1205.43 R10.1
NetR11_1: R11.1 U4.12 | length 183.5
  Top Layer w15: U4.12 2526.75,1044.31 2568.88,1044.31 R11.1
NetR12_1: R12.1 U4.11 | length 167
  Top Layer w15: U4.11 2549.41,990 2609.41,1050 R12.1
NetR13_1: R13.1 U4.10 | length 150
  Top Layer w15: U4.10 2549.41,940 2569.41,960 R13.1
NetR14_1: R14.1 U4.9 | length 150.4
  Top Layer w15: U4.9 2549.41,890 2569.41,870 R14.1
NetR15_1: R15.1 U4.15 | length 294.7
  Top Layer w15: U4.15 2549.41,1190 2580,1220.59 2580,1325.43 R15.1
NetR16_1: R16.1 U4.14 | length 254.7
  Top Layer w15: U4.14 2549.41,1140 2605,1195.59 2605,1260.43 R16.1
NetR17_1: R17.1 U5.13 | length 544.8
  Top Layer w15: U5.13 2549.57,715 R17.1
NetR18_1: R18.1 U5.12 | length 561.3
  Top Layer w15: U5.12 2460,665 2505,620 2615,510 R18.1
NetR19_1: R19.1 U5.11 | length 577.9
  Top Layer w15: U5.11 2430,615 2608.88,436.12 2648.44,436.12 R19.1
NetR20_1: R20.1 U5.10 | length 594.5
  Top Layer w15: U5.10 2429.57,565 R20.1
NetR21_1: R21.1 U5.9 | length 611
  Top Layer w15: U5.9 2389.57,515 R21.1
NetR22_1: R22.1 U5.15 | length 511.6
  Top Layer w15: U5.15 2629.57,815 R22.1
NetR23_1: R23.1 U5.14 | length 528.2
  Top Layer w15: U5.14 2589.57,765 R23.1
NetR24_1: R24.1 U6.7 | length 206.5
  Top Layer w10: U6.7@449.17,415.32 449.49,415 480,415 505.43,389.57 R24.1
NetR25_1: R25.1 U7.7 | length 214.5
  Bottom Layer w10: U7.7 2265.49,1264.4 2278.08,1264.4 2279.14,1265.46 2310.46,1265.46 2320.43,1275.43 R25.1
NetR26_2: R26.2 R27.1 U7.5 | length 199.8
  Bottom Layer w10: U7.5 2184.83,1307.65 2205.43,1328.25 R27.1 R26.2
P_1: J2.02 R29.1 U1.27 | length 837.6
  Top Layer w15: U1.27 1836.81,620 1847.03,609.78 1847.03,569.75 1944.29,472.49 2182.51,472.49 2256.49,398.51 R29.1 2271.74,339.75 2271.74,328.26 2326.58,273.42 2366.58,273.42 J2.02
P_2: J2.03 R28.1 U1.26 | length 763.3
  Top Layer w15: U1.26 1757.45,568.85 1757.45,527.55 1850,435 2040,435 2096.24,378.76 2096.24,370.25 R28.1 2111.49,350.03 2138.74,322.78 2138.74,322.39 2170.7,290.42 2249.58,290.42 J2.03
P_3: J2.04 R30.1 U1.25 | length 714.2
  Top Layer w15: U1.25 1715.73,560.57 1715.73,509.27 1870,355 R30.1 1966.49,350.03 1993.74,322.78 1993.74,322.39 2048.7,267.42 2172.58,267.42 J2.04
P_OUT: FB1.2 J7.02 | length 159.5
  Top Layer w10: J7.02 1603.39,288.39 FB1.2
Rx_ESP: J5.02 U1.36 | length 147.9
  Top Layer w15: U1.36 1890.12,1070 1915.12,1045 J5.02@1962.56,1045
sa1: R10.2 U8.7 | length 223.2
  Top Layer w15: R10.2 2895,1230 U8.7
sa2: R17.2 U9.7 | length 229.4
  Top Layer w15: R17.2 2795.43,660 U9.7
sb1: R11.2 U8.6 | length 388.6
  Top Layer w15: R11.2 2950.83,1140 2979.48,1168.65 2979.48,1245.52 U8.6
sb2: R18.2 U9.6 | length 432.1
  Top Layer w15: R18.2 2824.91,599.48 2935.3,599.48 2979.48,643.65 2979.48,720.52 U9.6
sc1: R12.2 U8.4 | length 864.2
  Top Layer w15: R12.2 2851.72,1050 2856.19,1045.52 3400.52,1045.52 U8.4
sc2: R19.2 U9.4 | length 986.4
  Top Layer w15: R19.2 2824.17,420 2923.65,320.52 2956.35,320.52 3055.83,420 3300,420 U9.4
SCL_IMU: R3.2 U1.17 U2.13 | length 383.7
  Top Layer w10: U2.13@1005,550 1030,550 1091.24,488.76 R3.2@1129.75,488.76 ; R3.2@1149.97,473.51 1166.46,490 1243.89,490 1295.3,541.41 U1.17@1295.3,560.57
  Top Layer w15: R3.2@1129.75,488.76 R3.2 R3.2@1149.97,473.51 ; U1.17@1295.3,560.57 U1.17
sd1: R13.2 U8.2 | length 827.3
  Top Layer w15: R13.2 2846.5,960 2860.98,945.52 3500.52,945.52 U8.2
sd2: R20.2 U9.2 | length 885.3
  Top Layer w15: R20.2 2849.22,330 2858.69,320.52 2891.12,320.52 2914.12,297.52 2965.88,297.52 2988.88,320.52 3400.52,320.52 U9.2
SDA_IMU: R4.2 U1.12 U2.14 | length 298.4
  Top Layer w10: R4.2 1056.49,695 ; U2.14 1002.16,570.92 1005.87,570.92 1014.95,580 1014.95,653.46 1056.49,695 ; U1.12 1081.49,720 1056.49,695
se1: R14.2 U8.1 | length 831.1
  Top Layer w15: R14.2 2841.72,870 2866.19,845.52 3175.12,845.52 3214.6,885 U8.1
se2: R21.2 U9.1 | length 854.3
  Top Layer w15: R21.2 3420,240 U9.1
sf1: R15.2 U8.9 | length 777
  Top Layer w15: R15.2 2930,1410 v2(3125,1215)
  Bottom Layer w15: U8.9 3125,1170 v2(3125,1215)
sf2: R22.2 U9.9 | length 674.4
  Top Layer w15: R22.2 2777.91,822.48 2965.88,822.48 3030,758.35 3030,550 U9.9
sg1: R16.2 U8.10 | length 881.9
  Top Layer w15: R16.2 2851.72,1320 2856.19,1324.48 2956.35,1324.48 3185,1095.83 v2(3185,1090)
  Bottom Layer w15: U8.10 2980,885 v2(3185,1090)
sg2: R23.2 U9.10 | length 790.3
  Top Layer w15: R23.2 2751.56,706.12 2826.65,706.12 2920,799.48 2956.35,799.48 3002.48,753.35 3002.48,566.65 2956.35,520.52 2944.7,520.52 2900.52,476.35 2900.52,399.48 U9.10
Tx_ESP: J5.01 U1.37 | length 302.8
  Top Layer w15: U1.37 1890.12,1120 1915.12,1145 J5.01
pads on no net: J6. J6.1 J6.2 J6.8 U1.10 U1.11 U1.15 U1.18 U1.22 U1.28 U1.29 U2.1 U2.2 U2.3 U2.4 U2.9 U2.10 U2.11 U3.2 U3.5 U3.6 U3.12 U3.13 U4.3 U4.4 U4.5 U5.3 U5.4 U5.5 U6.4 U7.4 U8.5 U9.5

## Polygon pours and split planes (outlines as drawn)
GND on Bottom Layer "GND_L02_P007" (solid, pour order 7): 230,1585 3405,1580 cw(c3405,1332.5) 3652.31,1322.9 3655,290 cw(c3365.1,300.08) 3365,10 185,20 cw(c182.5,187.5) 15,185 15,1360 cw(c235,1365)
GND on Top Layer "GND_L01_P006" (solid, remove dead copper, pour order 6): 3650,1355 3650,295 cw(c3367.5,295) 3367.5,12.5 207.5,12.5 cw(c207.5,202.5) 17.5,202.5 25,1355 cw(c235,1355) 235,1565 3430,1565 cw(c3435,1350)

## Keep-outs
Keep-Out Layer:
  the board outline again, w47.24

## Silkscreen, mask and mechanical layers (free items; w line width, h text height)
Top Overlay:
  text "Cook-It" at 2895,72.64 h150

## Text inside footprints (layer, text, board x,y; h text height)
U1: Top 3D Body "ANTENNA" at 1303.35,1436.93 h50